# Altium PCB slider_V01.PcbDoc
Units mm, origin at the board's own origin, x right, y up, seen from the top; angles counter-clockwise.
Board outline 80 x 94 mm, 2 copper layers (Top Layer, Bottom Layer); 38 components, 37 nets, 182 pads, 21 vias.
Unrouted connection lines stored in the file: 8.
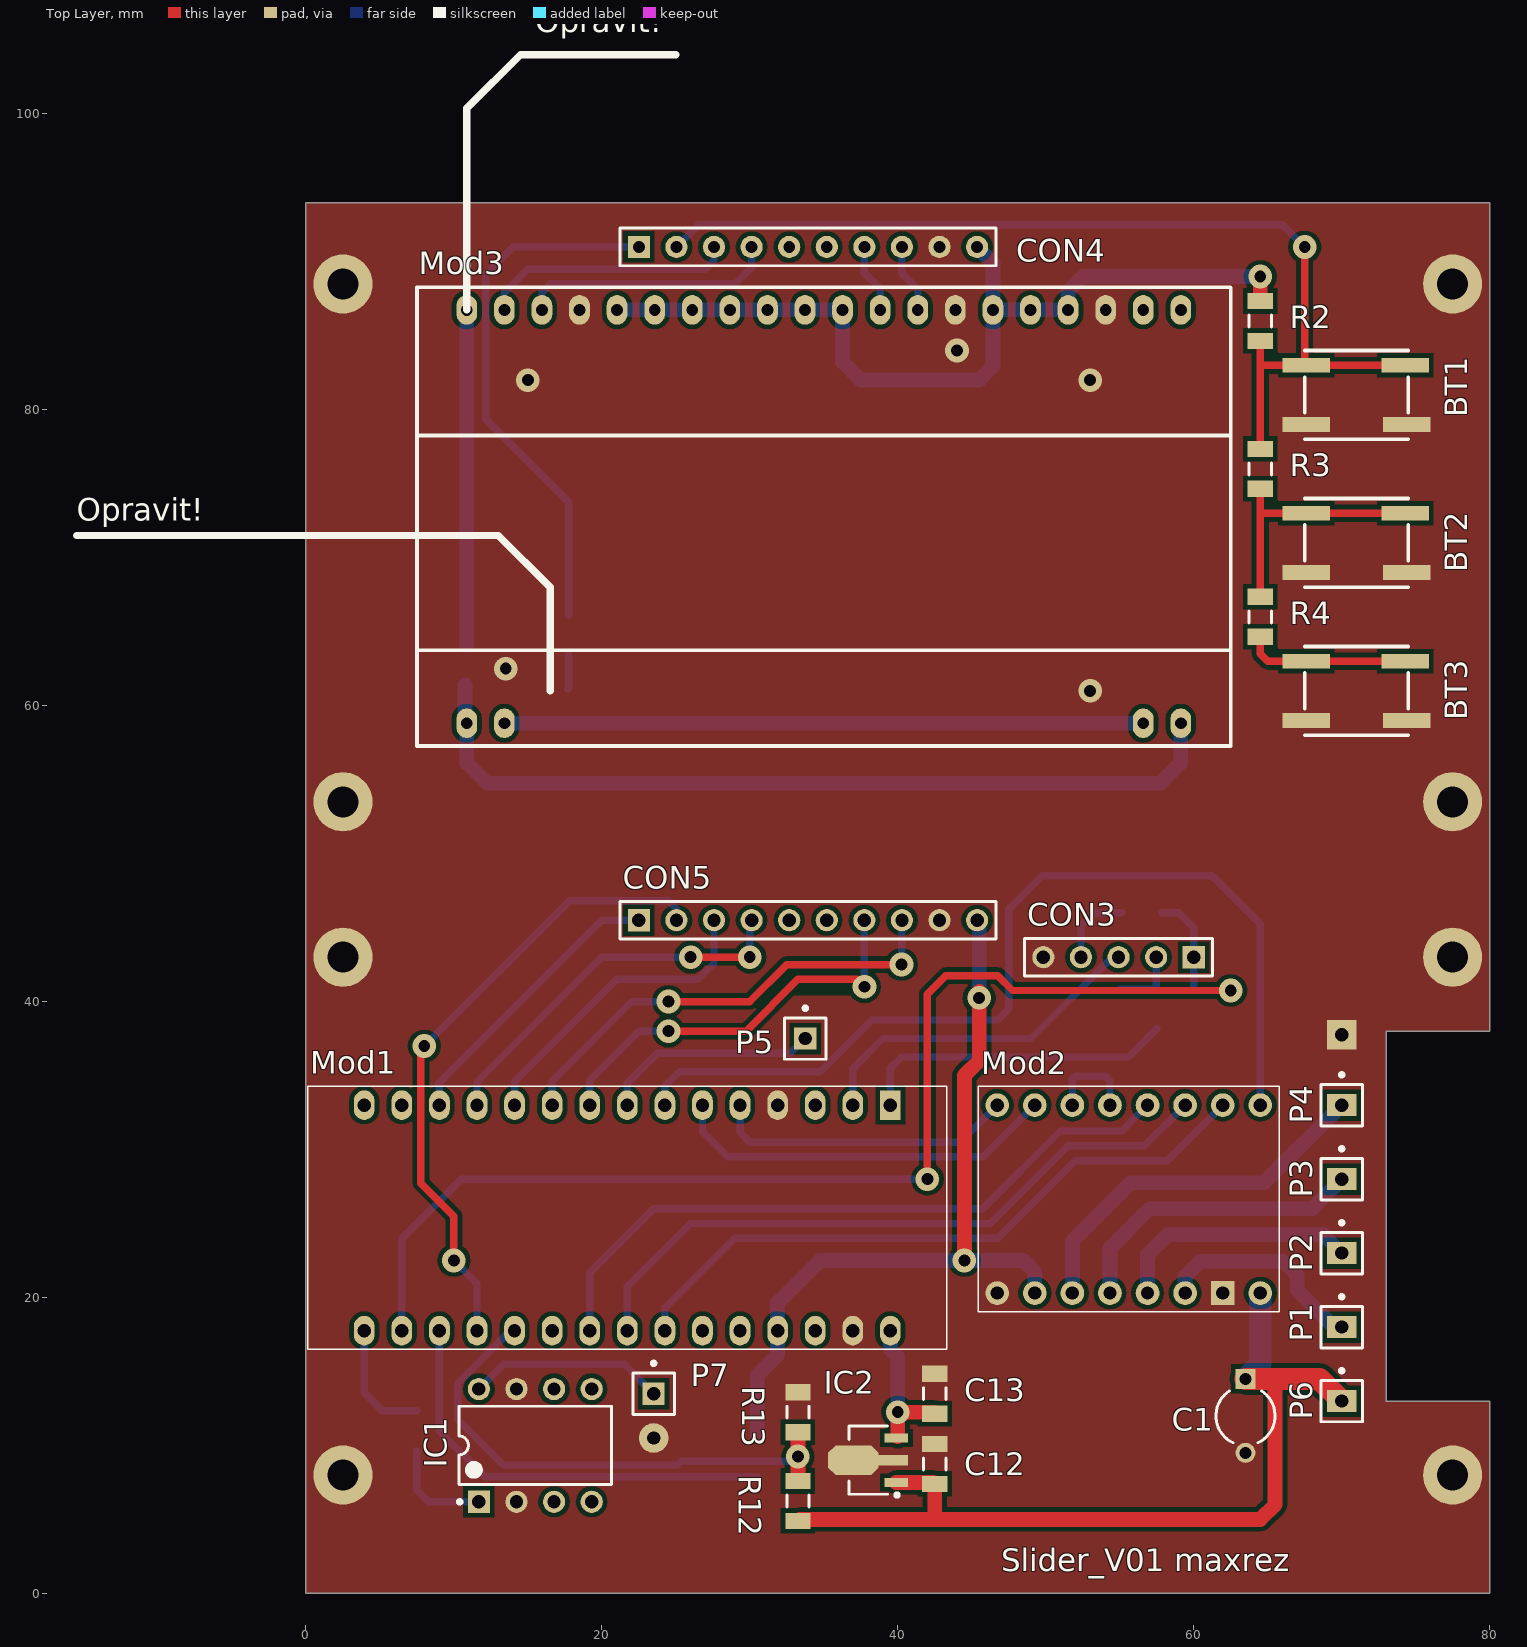
[diagram p0: Top Layer view]
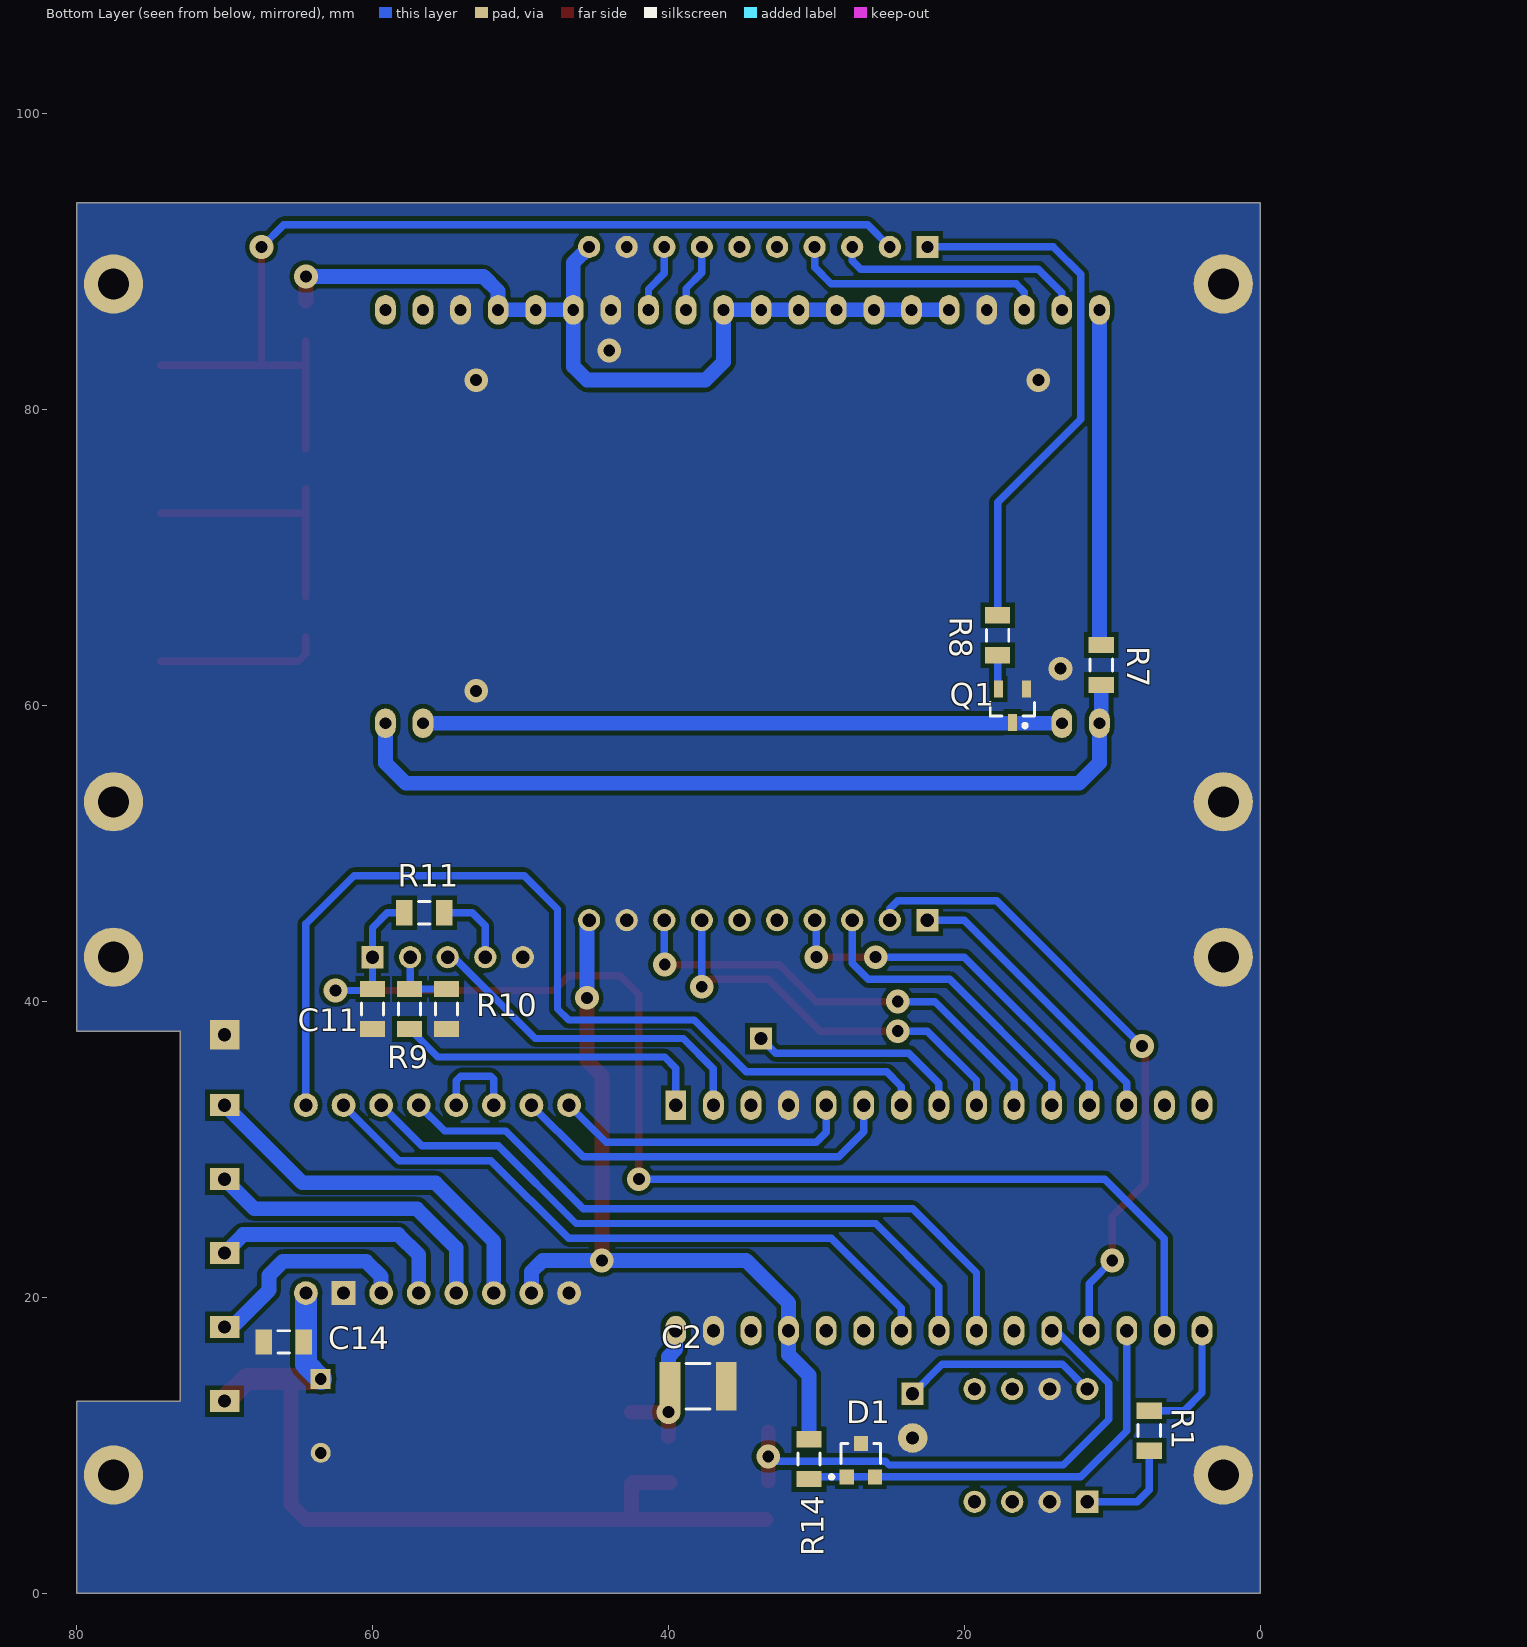
[diagram p1: Bottom Layer view, seen from below]

## Layer stack, top to bottom
Top Solder: solder mask 0.0102, Solder Resist, Dk 3.5
Top Layer: signal copper 0.0356
Dielectric1: dielectric 0.32, FR-4, Dk 4.8
Bottom Layer: signal copper 0.0356
Bottom Solder: solder mask 0.0102, Solder Resist, Dk 3.5

## Board outline
0,0 0,94 80,94 80,38 73,38 73,13 80,13 80,0

## Design rules (kind name [scope] priority, off if disabled: settings)
Clearance [All] p1: gap=0.3
PlaneConnect [All] p1: planeconnectstyle=Direct reliefexpansion=0.508 reliefentries=4 reliefconductorwidth=0.254 reliefairgap=0.254
PolygonConnect [All] p1: connectstyle=Direct reliefconductorwidth=0.254 reliefentries=4 polygonreliefangle="90 Angle" airgapwidth=0.254
RoutingVias [All] p1: holewidth=0.711 width=1.27 viastyle="Through Hole" minholewidth=0.711 minwidth=1.27 maxholewidth=0.711 maxwidth=1.27
SilkToSolderMaskClearance SilkscreenOverComponentPads [IsPad] p1: minsilkscreentomaskgap=0.254 clearancetoexposedcopper=TRUE
SolderMaskExpansion [All] p1: expansion=0.102
Width [All] p1: maxlimit=2 minlimit=0.2 preferedwidth=0.3
28 further rules are at their usual default settings.

## Components (designator, comment, footprint, x,y, rotation, side; value= is the part's Value field where it differs from the comment)
BT1 "EVQP0" EVQP0 71,81 r180 top
BT2 "EVQP0" EVQP0 71,71 r180 top
BT3 "EVQP0" EVQP0 71,61 r180 top
C1 "100V" CAPR5-4X5 63.5,12 r270 top
C2 "Cap Pol3" 1812 38,14 r180 bottom
C11 "Cap Semi" C1206 60,39.5 r270 bottom
C12 "Cap Semi" C1206 42.5,8.75 r270 top
C13 "Cap Semi" C1206 42.5,13.5 r270 top
C14 "Cap Semi" C1206 66,17 r0 bottom
CON3 "bluetooth" HDR1X5 60,43 r180 top
CON4 "Header 10" HDR1X10#1 22.5,91 r0 top
CON5 "Header 10" HDR1X10#2 22.5,45.5 r0 top
D1 "TL431a" SOT23-3 27,9 r180 bottom
IC1 "PC827" DIP-8 15.5,10 r90 top
IC2 "LM780x" SOT89M 38,9 r180 top
Mod1 "Arduino NANO" "arduino nano" 39.5,33 r270 top
Mod2 "Pololou DRV8225" "Pololou DRV8225" 64.5,33 r270 top
Mod3 "EA DOGMxxx-A" "EA DOGMxxx-A" 35,71 r0 top
P1 "Plug" PIN1#1 70,18 r0 top
P2 "Plug" PIN1#1 70,23 r0 top
P3 "Plug" PIN1#1 70,28 r0 top
P4 "Plug" PIN1#1 70,33 r0 top
P5 "Plug" PIN1#2 33.75,37.5 r0 top
P6 "Plug" PIN1#1 70,13 r0 top
P7 "Plug" PIN1#2 23.5,13.5 r0 top
Q1 "NPN" SOT23_N 16.75,60 r270 bottom
R1 "Res2" C1206 7.5,11 r270 bottom
R2 "Res2" C1206 64.5,86 r90 top
R3 "Res2" C1206 64.5,76 r90 top
R4 "Res2" C1206 64.5,66 r90 top
R7 "Res2" C1206 10.75,62.75 r90 bottom
R8 "Res2" C1206 17.75,64.75 r90 bottom
R9 "Res2" C1206 57.5,39.5 r270 bottom
R10 "Res2" C1206 55,39.5 r90 bottom
R11 "Res2" C1206 56.5,46 r0 bottom
R12 "Res2" C1206 33.25,6.25 r270 top
R13 "Res2" C1206 33.25,12.25 r270 top
R14 "Res2" C1206 30.5,9.075 r90 bottom

## Footprints (in the part's own frame and the unit in brackets; to place one, negate y for a bottom-side part, rotate by r counter-clockwise, add the part's x,y. Pads: shape width x height; smd on the part's side, far side on the other; paste and mask are expansions set on the pad)
1812 [mm] "Chip Capacitor, Body 4.5x3.2mm, IPC High Density"
  rect 1.4x3.3 smd: 1(-1.9,0) 2(1.9,0)
  silkscreen extent -0.8,-1.55 0.8,1.55, body extent -2.4,-1.7 2.4,1.7, height 1.4
"arduino nano" [mm]
  round 0 all layers, no hole: 0(0,2.54) 0(0,-38.1) 0(15.24,2.54) 0(15.24,-38.1)
  rect 2x1.4 hole 0.9: 1(0,0)
  oval 2x1.4 hole 0.9: 2(0,-2.54) 3(0,-5.08) 4(0,-7.62) 5(0,-10.16) 6(0,-12.7) 7(0,-15.24) 8(0,-17.78) 9(0,-20.32) 10(0,-22.86) 11(0,-25.4) 12(0,-27.94) 13(0,-30.48) 14(0,-33.02) 15(0,-35.56) 16(15.24,-35.56) 17(15.24,-33.02) 18(15.24,-30.48) 19(15.24,-27.94) 20(15.24,-25.4) 21(15.24,-22.86) 22(15.24,-20.32) 23(15.24,-17.78) 24(15.24,-15.24) 25(15.24,-12.7) 26(15.24,-10.16) 27(15.24,-7.62) 28(15.24,-5.08) 29(15.24,-2.54) 30(15.24,0)
  silkscreen extent -1.27,-39.37 16.51,3.81
C1206 [mm] "Chip Capacitor, Body 3.2x1.6mm, IPC High Density"
  rect 1.1x1.7 smd: 1(-1.35,0) 2(1.35,0)
  silkscreen extent -0.4,-0.75 0.4,0.75, body extent -1.7,-0.9 1.7,0.9, height 1.3
CAPR5-4X5 [mm] "Capacitor; 2 Leads"
  rect 1.35x1.35 hole 0.8: 1(-2.5,0)
  round 1.35 hole 0.8: 2(2.5,0)
  silkscreen extent -1.69,-2 1.82,2
DIP-8 [mm] "DIP; 8 Leads; Row Spacing 7.62 mm; Pitch 2.54 mm"
  rect 1.5x1.5 hole 0.9: 1(-3.81,3.81)
  round 1.5 hole 0.9: 2(-3.81,1.27) 3(-3.81,-1.27) 4(-3.81,-3.81) 5(3.81,-3.81) 6(3.81,-1.27) 7(3.81,1.27) 8(3.81,3.81)
  silkscreen extent -3.93,-5.15 2.65,5.23, body extent -3.6,-5.15 3.6,5.15, height 5.08
"EA DOGMxxx-A" [mm]
  oval 1.4x2 hole 0.8: 1(-24.13,-12.19) 2(-21.59,-12.19) 19(21.59,-12.19) 20(24.13,-12.19) 21(24.13,15.75) 22(21.59,15.75) 23(19.05,15.75) 24(16.51,15.75) 25(13.97,15.75) 26(11.43,15.75) 27(8.89,15.75) 28(6.35,15.75) 29(3.81,15.75) 30(1.27,15.75) 31(-1.27,15.75) 32(-3.81,15.75) 33(-6.35,15.75) 34(-8.89,15.75) 35(-11.43,15.75) 36(-13.97,15.75) 37(-16.51,15.75) 38(-19.05,15.75) 39(-21.59,15.75) 40(-24.13,15.75)
  silkscreen extent -27.5,-13.75 27.5,17.28
EVQP0 [mm]
  rect 3.2x1 smd: 1(-3.3,-2) 2(3.4,-2) 3(3.4,2) 4(-3.4,2)
  silkscreen extent -3.5,-3 3.5,3
HDR1X5 [mm] "Connector; Header; 5 Position"
  rect 1.5x1.5 hole 0.9: 1(0,0)
  round 1.5 hole 0.9: 2(2.54,0) 3(5.08,0) 4(7.62,0) 5(10.16,0)
  silkscreen extent -1.27,-1.27 11.43,1.27
HDR1X10#1 [mm] "Connector; Header; 10 Position"
  rect 1.5x1.5 hole 0.8: 1(0,0)
  round 1.5 hole 0.8: 2(2.54,0) 3(5.08,0) 4(7.62,0) 5(10.16,0) 6(12.7,0) 7(15.24,0) 8(17.78,0) 9(20.32,0) 10(22.86,0)
  silkscreen extent -1.27,-1.27 24.13,1.27
HDR1X10#2 [mm] "Connector; Header; 10 Position"
  rect 1.5x1.5 hole 0.9: 1(0,0)
  round 1.5 hole 0.9: 2(2.54,0) 3(5.08,0) 4(7.62,0) 5(10.16,0) 6(12.7,0) 7(15.24,0) 8(17.78,0) 9(20.32,0) 10(22.86,0)
  silkscreen extent -1.27,-1.27 24.13,1.27
PIN1#1 [mm] "Connector; Plug"
  rect 2x1.5 hole 0.9: 1(0,0)
  silkscreen extent -1.4,-1.4 1.4,2.17
PIN1#2 [mm] "Connector; Plug"
  rect 1.5x1.5 hole 0.9: 1(0,0)
  silkscreen extent -1.4,-1.4 1.4,2.17
"Pololou DRV8225" [mm]
  round 1.6 hole 0.9: 1(0,0) 2(0,-2.54) 3(0,-5.08) 4(0,-7.62) 5(0,-10.16) 6(0,-12.7) 7(0,-15.24) 8(0,-17.78) 9(12.7,-17.78) 10(12.7,-15.24) 11(12.7,-12.7) 12(12.7,-10.16) 13(12.7,-7.62) 14(12.7,-5.08) 16(12.7,0)
  rect 1.6x1.6 hole 0.9: 15(12.7,-2.54)
  silkscreen extent -1.27,-19.05 13.97,1.27
SOT23-3 [mm] "SOT-23; 3 Leads; Body 3.0 x 2.5 mm, inc. leads (LxW max)"
  rect 0.95x1 smd: 1(-0.95,-1.125) 2(0.95,-1.125) 3(0,1.125)
  silkscreen extent -2.1,-1.25 1.32,1.13
SOT23_N [mm] "SOT23, 3-Leads, Body 2.9x1.3mm, Pitch 0.95mm, Lead Span 2.3mm - Reverse Pinning, IPC Medium Density"
  rect 1.15x0.6 smd: 1(1.125,0) 2(-1.125,-0.95) 3(-1.125,0.95)
  silkscreen extent -0.2,-1.5 1.47,1.5, body extent -0.7,-1.5 0.7,1.5, height 1.1
SOT89M [mm] "SOT89, 3-Leads, Body 4.5x2.4 mm, Pitch 1.5mm, Lead Span 4.1mm, IPC Low Density"
  rect 1.6x0.6 smd: 1(-1.9,1.5) 3(-1.9,-1.5)
  rect 2x0.7 smd: 2(-1.7,0)
  oct 3.4x2 smd: 2(1,0)
  silkscreen extent -2.07,-2.3 1.3,2.47, body extent -1.3,-2.3 1.3,2.3, height 1.6

## Part data
C1: library part "Cap Pol3", "Polarized Capacitor (Surface Mount)"
C2: "Polarized Capacitor (Surface Mount)"
C11 C12 C13 C14: "Capacitor (Semiconductor SIM Model)"
CON3: library part "Header 5", "Header, 5-Pin"
CON4 CON5: "Header, 10-Pin"
Q1: "NPN Bipolar Transistor"
R1 R2 R3 R4 R7 R8 R9 R10 R11 R12 R13 R14: "Resistor"

## Free pads (board coordinates)
  round 4 hole 2.1: 0(2.5,8) 0(2.5,43) 0(2.5,53.5) 0(2.5,88.5) 0(77.5,8) 0(77.5,43) 0(77.5,53.5) 0(77.5,88.5)
  rect 2x2 hole 0.9: 0(70,37.75)
  round 2 hole 0.9: 1(23.5,10.5)

## Via types
v1: diameter 1.6, hole 0.8, Top Layer to Bottom Layer, 21 vias

## Nets (pads, with @x,y where several pads share a name; then routed paths per layer and width w, separated by ;. In a path a pad name is that pad's centre, name@x,y a point inside that pad or via, vN(x,y) a via of type N, cw(c..) or ccw(c..) an arc to the next point about the centre after c; other vN are vias at no path point)
3V3: C11.1 CON3.1 Mod1.17 R11.2 | length 86.6
  Top Layer w0.5: v1(42,28) 42,40.5 43.25,41.75 46.75,41.75 47.75,40.75 v1(62.5,40.75)
  Bottom Layer w0.5: Mod1.17 6.48,23.98 10.5,28 v1(42,28) ; R11.2 59,46 60,45 CON3.1 C11.1 60.1,40.75 v1(62.5,40.75)
+5V: CON4.10 CON5.10 Mod1.27 Mod2.10 Mod3.24 Mod3.25 Mod3.26 Mod3.30 Mod3.31 Mod3.32 Mod3.33 Mod3.34 Mod3.35 Mod3.36 Mod3.40 R2.2 R7.2 R14.2 | length 135.7
  Top Layer w1: v1(44.5,22.5) 44.5,35 45.5,36 v1(45.5,40.25) v1@45.5,40.7 ; R2.2 v1(64.5,89)
  Bottom Layer w1: R7.2@10.87,64.1 Mod3.40 ; Mod3.36 Mod3.35 Mod3.34 Mod3.33 Mod3.32 Mod3.31 Mod3.30 36.27,83.23 37.5,82 45.5,82 46.43,82.93 Mod3.26 ; R14.2@30.5,10.6 30.5,14.75 31.88,16.13 Mod1.27 31.88,19.63 34.75,22.5 v1@44,22.5 ; v1(44.5,22.5) 48.5,22.5 49.26,21.74 Mod2.10 ; CON5.10 45.5,45.36 v1(45.5,40.25) ; CON4.10 46.43,89.93 Mod3.26 ; v1(64.5,89) 52.5,89 51.51,88.01 Mod3.24 Mod3.25 Mod3.26
+9V: C2.1 C13.2 IC2.3 Mod1.30 | length 9.9
  Top Layer w1: IC2.3@40,10.6 v1(40,12.25) C13.2@42.5,12.25
  Bottom Layer w1: Mod1.30 39.5,16.5 40,16 v1(40,12.25)
+12V: C1.1 C12.2 C14.1 IC2.1 Mod2.16 P6.1 R12.2 | length 59.4
  Top Layer w1: R12.2@33.4,5 42.5,5 ; IC2.1 42.4,7.5 C12.2 42.5,5 ; 65.5,14.5 65.5,6 64.5,5 42.5,5
  Top Layer w1.5: C1.1 65.5,14.5 68.5,14.5 P6.1
  Bottom Layer w1.5: C1.1 64.5,15.5 Mod2.16
BL: CON4.1 CON5.1 Mod1.13 R8.2 | length 56
  Bottom Layer w0.5: Mod1.13 9.02,34.52 20,45.5 CON5.1 ; R8.2 17.75,73.75 12.144,79.356 12.144,89.144 14,91 CON4.1
CLK: CON4.7 CON5.7 Mod1.9 Mod3.29 | length 32.5
  Top Layer w0.5: v1(24.5,38) 29.75,38 33.25,41.5 37.25,41.5 v1(37.75,41)
  Bottom Layer w0.5: Mod1.9 19.18,34.68 22.5,38 v1(24.5,38) ; CON5.7 37.74,41.01 v1(37.75,41) ; CON4.7 37.74,89.26 38.81,88.19 Mod3.29
CS: CON4.4 CON5.4 Mod1.12 Mod3.38 | length 43.5
  Top Layer w0.5: v1(26,43) v1(30,43)
  Bottom Layer w0.5: Mod1.12 11.56,34.56 20,43 v1(26,43) ; Mod3.38 15.95,87.95 16.5,88.5 29,88.5 30.12,89.62 CON4.4 ; v1(30,43) 30,45.38 CON5.4
DIR: Mod1.5 Mod2.8 | length 20.5
  Bottom Layer w0.5: Mod1.5 29.34,31.16 30,30.5 44.22,30.5 Mod2.8
DRV_EN: Mod1.7 Mod2.1 | length 64.9
  Bottom Layer w0.5: Mod1.7 24.26,34.26 25.25,35.25 34.75,35.25 38.25,38.75 46.75,38.75 47.5,39.5 47.5,46.25 49.75,48.5 61.25,48.5 64.5,45.25 Mod2.1
GND: BT1.3 BT1.4 BT2.3 BT2.4 BT3.3 BT3.4 C1.2 C2.2 C11.2 C12.1 C13.1 C14.2 CON3.5 CON4.9 CON5.9 D1.3 IC1.2 IC1.7 IC2.2 Mod1.4 Mod1.29 Mod2.9 Mod2.15 Mod3.23 Mod3.27 Mod3.37 pad.0 pad.1 Q1.3 R10.1 R13.1
  other v1: 53,61 13.5,62.5 15,82 53,82 44,84
NetBT2_1: BT2.1 BT2.2 R3.1 R4.2 | length 17.1
  Top Layer w0.5: R4.2 64.5,73 ; R3.1 64.5,73 ; BT2.1 BT2.2 64.5,73
NetBT3_1: BT3.1 BT3.2 R4.1 | length 11.2
  Top Layer w0.5: R4.1 64.5,63.5 65,63 BT3.2 BT3.1
NetD1_1: D1.1 D1.2 Mod1.18 R14.1 | length 29.6
  Bottom Layer w0.5: Mod1.18 9.02,10.98 12.125,7.875 D1.2 D1.1 30.475,7.875 R14.1@30.5,7.9
NetIC1_1: IC1.1 R1.2 | length 7.2
  Bottom Layer w0.5: R1.2 7.5,7 8.31,6.19 IC1.1
NetIC1_8: IC1.8 P7.1 | length 13.3
  Bottom Layer w0.5: IC1.8 13.38,15.5 21.5,15.5 P7.1
NetMod1_1: Mod1.1 R9.2 | length 21.6
  Bottom Layer w0.5: Mod1.1 39.5,35.5 40.25,36.25 55.6,36.25 R9.2
NetMod1_8: Mod1.8 P5.1 | length 14.8
  Bottom Layer w0.5: Mod1.8 21.72,34.47 23.75,36.5 32.75,36.5 P5.1
NetMod1_16: Mod1.16 R1.1 | length 8.3
  Bottom Layer w0.5: Mod1.16 3.94,13.56 5.15,12.35 R1.1
NetMod1_20: Mod1.20 R12.1 R13.2 | length 35.1
  Top Layer w1: R12.1 v1(33.25,9.25) R13.2
  Bottom Layer w0.5: Mod1.20 13.802,17.76 10.25,14.208 10.25,11.75 13.325,8.675 25.097,8.675 25.347,8.925 v1@32.925,8.925
NetMod1_22: Mod1.22 Mod2.4 | length 46.3
  Bottom Layer w0.5: Mod1.22 19.18,21.68 23.5,26 45.75,26 51,31.25 55.13,31.25 Mod2.4
NetMod1_23: Mod1.23 Mod2.3 | length 45.7
  Bottom Layer w0.5: Mod1.23 21.72,20.72 26,25 46.25,25 51.5,30.25 56.67,30.25 Mod2.3
NetMod1_24: Mod1.24 Mod2.2 | length 44.9
  Bottom Layer w0.5: Mod1.24 24.26,19.26 29,24 46.75,24 52,29.25 58.21,29.25 Mod2.2
NetMod2_5: Mod2.5 Mod2.6 | length 6.2
  Bottom Layer w0.5: Mod2.6 51.8,34.75 52,34.95 54.05,34.95 54.34,34.66 Mod2.5
NetMod2_11: Mod2.11 P4.1 | length 25.5
  Bottom Layer w1: Mod2.11 51.8,23.8 55.75,27.75 64.75,27.75 P4.1
NetMod2_12: Mod2.12 P3.1 | length 20.6
  Bottom Layer w1: Mod2.12 54.34,23.34 57,26 68,26 P3.1
NetMod2_13: Mod2.13 P2.1 | length 16.7
  Bottom Layer w1: Mod2.13@56.88,20.38 56.88,22.88 58.25,24.25 68.75,24.25 P2.1
NetMod2_14: Mod2.14 P1.1 | length 14.6
  Bottom Layer w1: Mod2.14 59.42,21.42 60.45,22.45 66.05,22.45 67,21.5 67,20.5 69.5,18 P1.1
NetMod3_1: Mod3.1 Mod3.20 R7.1 | length 57.4
  Bottom Layer w1: R7.1 10.75,58.93 Mod3.1 10.87,56.13 12.25,54.75 57.75,54.75 59.13,56.13 Mod3.20
NetMod3_2: Mod3.2 Mod3.19 Q1.1 | length 43.2
  Bottom Layer w1: Mod3.2 Mod3.19
NetQ1_2: Q1.2 R8.1 | length 2.3
  Bottom Layer w0.5: Q1.2 17.75,61.175 R8.1
RESET: CON3.4 R11.1 | length 5.3
  Bottom Layer w0.5: CON3.4 52.38,45.13 53.25,46 R11.1
RS: CON4.3 CON5.3 Mod1.11 Mod3.39 | length 38.5
  Bottom Layer w0.5: Mod3.39 13.41,87.91 15,89.5 27,89.5 27.58,90.08 CON4.3 ; Mod1.11 14.1,34.6 21,41.5 26.5,41.5 27.58,42.58 CON5.3
RXD: CON3.3 Mod1.2 | length 23.5
  Bottom Layer w0.5: Mod1.2 36.96,35.46 39,37.5 49,37.5 54.5,43 CON3.3
SI: CON4.8 CON5.8 Mod1.10 Mod3.28 | length 37.1
  Top Layer w0.5: v1(24.5,40) 30,40 32.5,42.5 v1(40.25,42.5) v1@40.5,42.5
  Bottom Layer w0.5: Mod1.10 16.64,34.64 22,40 v1(24.5,40) ; CON5.8 40.28,42.78 40,42.5 v1@40.5,42.5 ; CON4.8 40.28,89.22 41.35,88.15 Mod3.28
STEP: Mod1.6 Mod2.7 | length 26.4
  Bottom Layer w0.5: Mod1.6 26.8,31.2 28.5,29.5 45.76,29.5 Mod2.7
TL: BT1.1 BT1.2 CON4.2 CON5.2 Mod1.19 R2.1 R3.2 | length 111.9
  Top Layer w0.5: v1(8,37) 7.77,36.77 7.77,27.73 10,25.5 v1(10,22.5) ; R3.2 64.5,83 ; R2.1 64.5,83 ; v1(67.5,91) 67.5,83.1 BT1.2 ; BT1.1 BT1.2 ; 64.5,83 BT1.2
  Bottom Layer w0.5: v1(8,37) 17.823,46.823 24.5,46.823 25.04,46.283 CON5.2 ; v1(10,22.5) 11.56,20.94 Mod1.19 ; CON4.2 26.54,92.5 66,92.5 v1(67.5,91)
TXD: CON3.2 R9.1 R10.2 | length 4.7
  Bottom Layer w0.5: R10.2 R9.1 57.46,40.89 CON3.2
pads on no net: CON4.5 CON4.6 CON5.5 CON5.6 IC1.3 IC1.4 IC1.5 IC1.6 Mod1.0 Mod1.3 Mod1.14 Mod1.15 Mod1.21 Mod1.25 Mod1.26 Mod1.28 Mod3.21 Mod3.22

## Polygon pours and split planes (outlines as drawn)
GND on Bottom Layer "Top Layer-No Net" (solid, pour order 2): 0,94 0,51 80,51 80,94 0,94
GND on Bottom Layer "Top Layer-No Net" (solid, pour order 9): 0,51 80,51 80,38 73,38 73,13 80,13 80,0 0,0
GND on Top Layer "Top Layer-No Net" (solid, pour order 4): 0,94 0,51 80,51 80,94 0,94
GND on Top Layer "Top Layer-No Net" (solid, pour order 7): 0,51 80,51 80,38 73,38 73,13 80,13 80,0 0,0 0,51 80,51

## Silkscreen, mask and mechanical layers (free items; w line width, h text height)
Top Overlay:
  lines w0.5: -15.5,71.5 13,71.5 16.5,68 16.5,61 ; 10.87,86.75 10.87,100.37 14.5,104 25,104
  text "Opravit!" at 15.5,105.5 h1.52
  text "Opravit!" at -15.5,72.5 h1.52
  text "Slider_V01 maxrez" at 47,1.5 h1.52
Mechanical 1:
  lines w0.254: 0,51 80,51 ; 0,0 80,0 80,13 73,13 73,38 80,38 80,94 0,94 0,0
Mechanical 13:
  lines w0.254: 44.5,5.5 62.5,5.5 62.5,15.5 44.5,15.5 44.5,5.5